# EAGLE board 18thF (EAGLE 9.6.2)
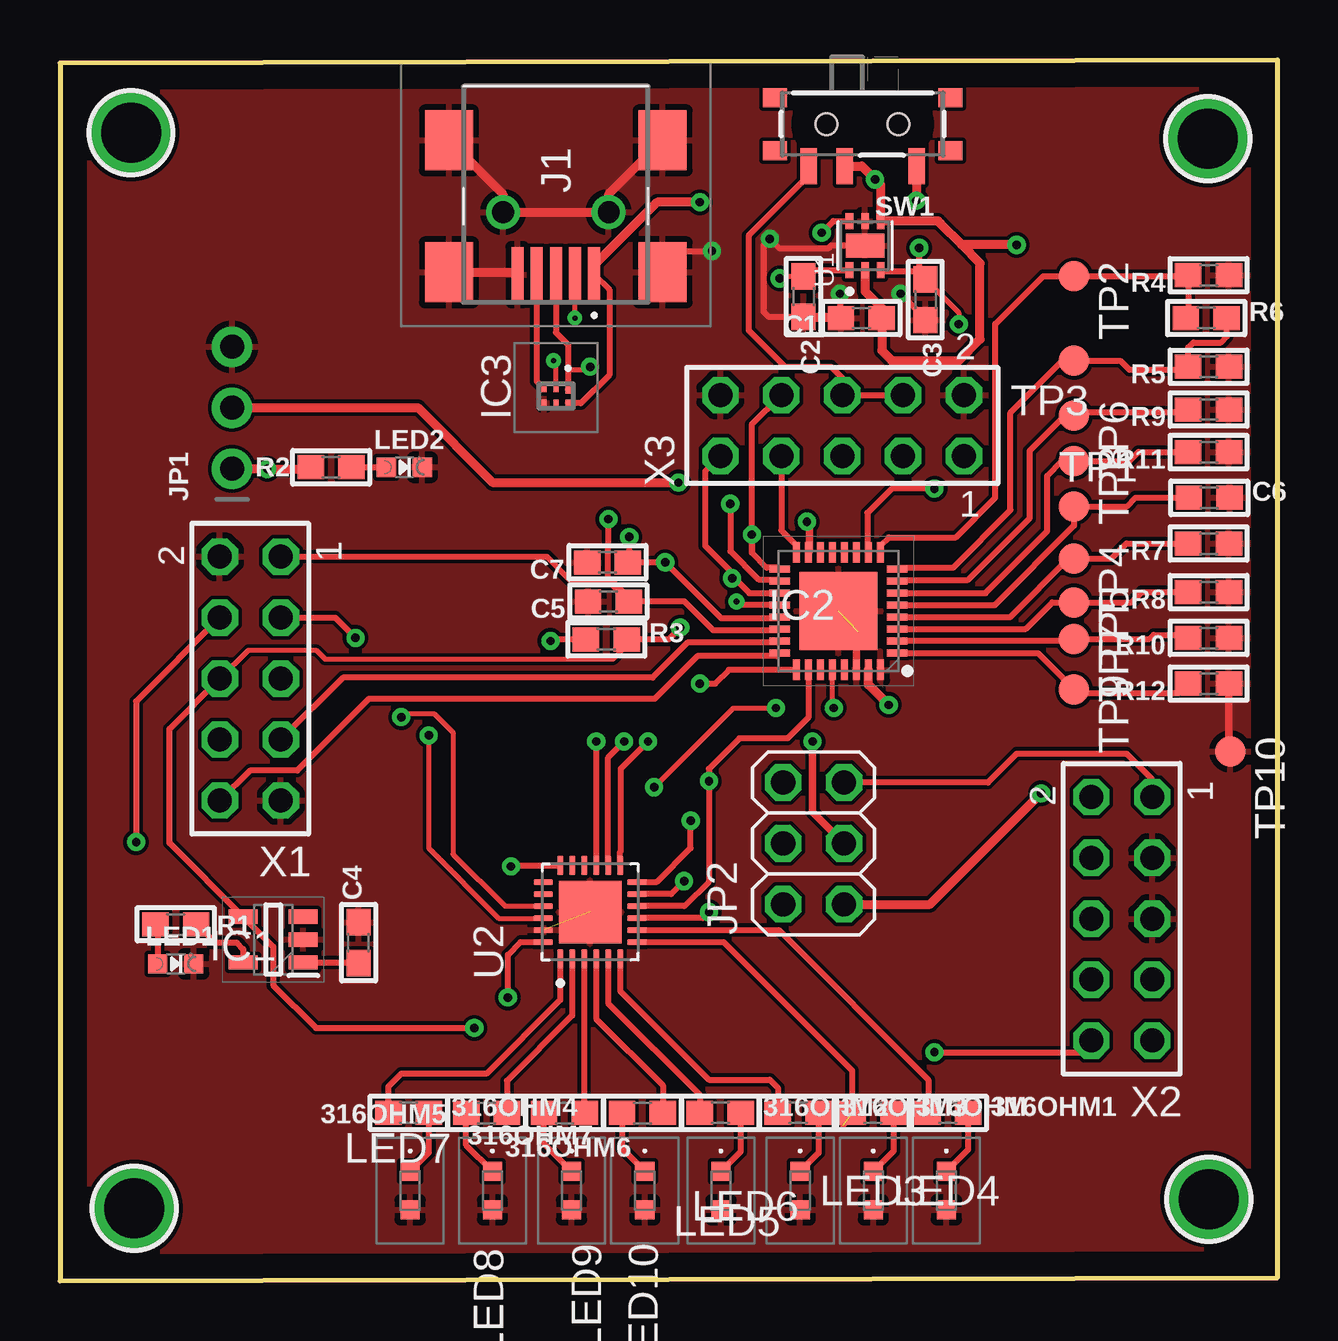
[diagram p0: board, top side]
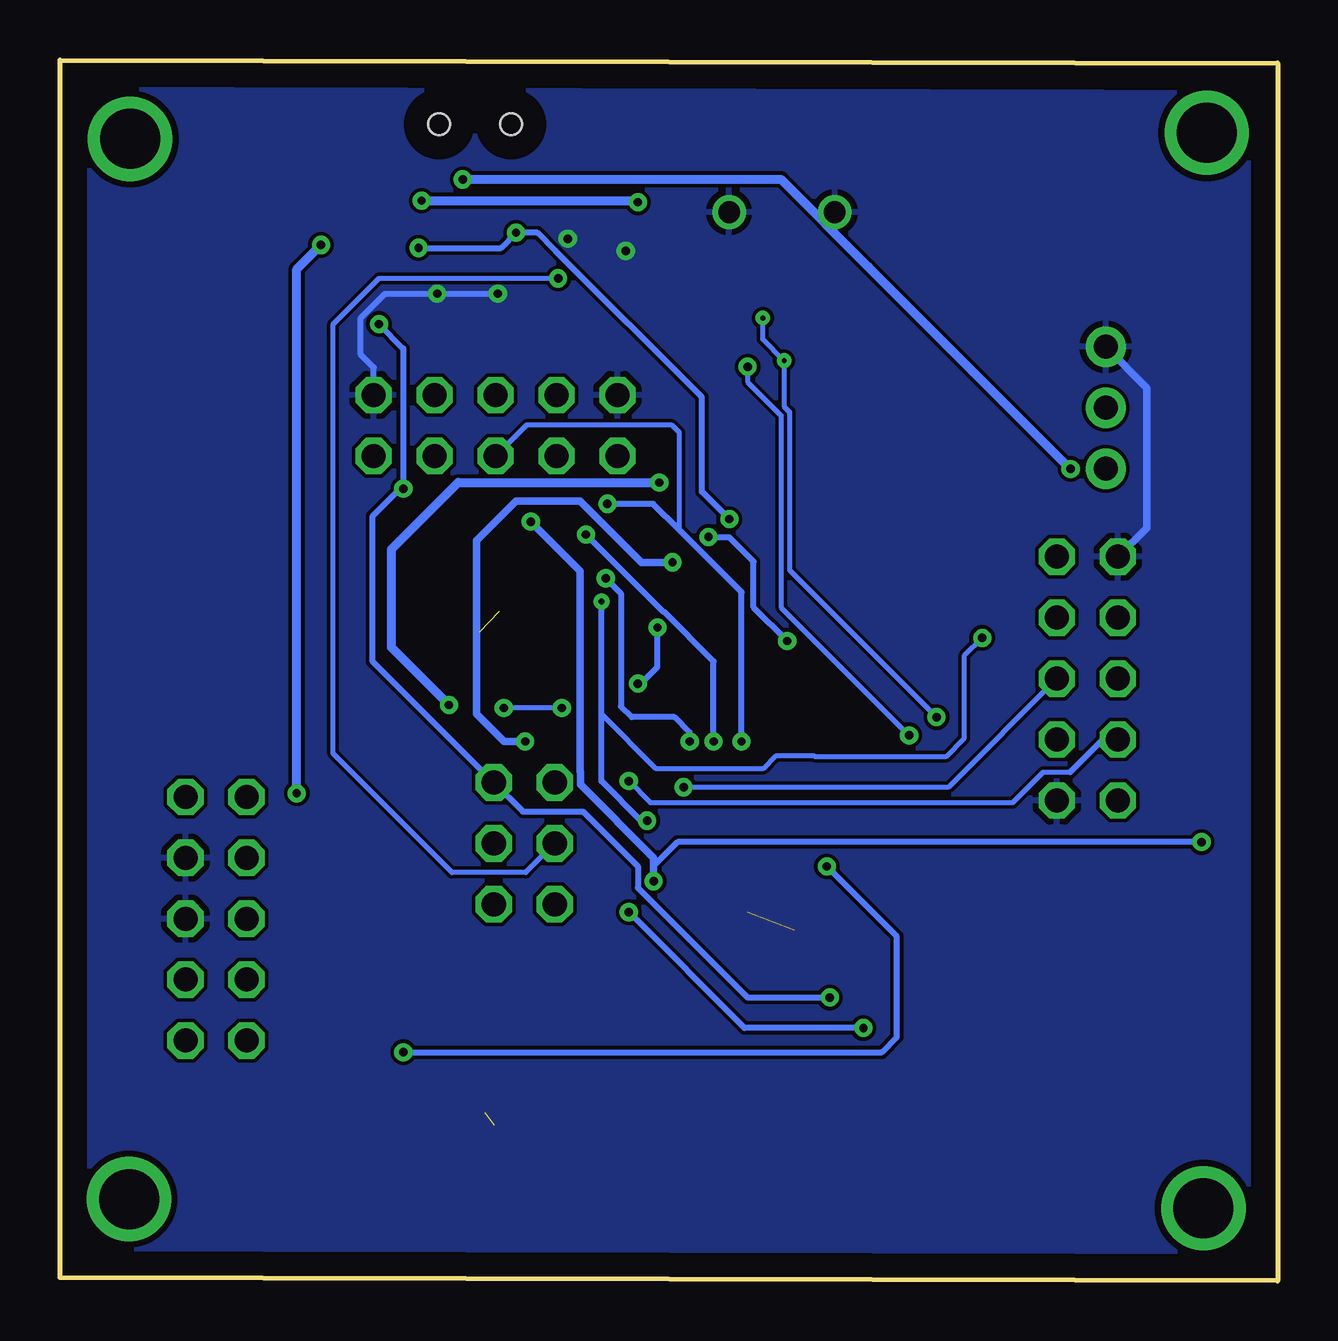
[diagram p1: board, bottom side, seen from below]

Size 50.76 x 50.89 mm. Coordinates in mm from the lower left corner, seen from the top.
Outline: 0,0 50.76,0.13 50.76,50.89 0,50.76 0,0
Copper layers (1*16): Top 0.035mm / dielectric 1.5mm / Bottom 0.035mm
Design rules "default": minimum track width 6mil, minimum drill 0.35mm, track to track 6mil, track to pad 6mil, pad to pad 6mil, via to via 6mil, smd to smd 6mil, copper to edge 40mil, drill to drill 6mil, minimum pad ring 10mil, minimum via ring 8mil, stop-mask expansion 4mil, vias tented up to drill 0mil, thermal gap 10mil

## Footprints (pad centres in the part's own frame; a part is rotated, then mirrored left to right if it is on the bottom)
0603 = smd 1.1 x 1: 1 -0.85,0; 2 0.85,0
SOT95P280X145-5N = smd 1.2 x 0.6: 1 -1.25,0.95; 2 -1.25,0; 3 -1.25,-0.95; 4 1.25,-0.95; 5 1.25,0.95
QFN50P500X500X100-33N = smd 0.85 x 0.3: 1 -2.45,1.75; 2 -2.45,1.25; 3 -2.45,0.75; 4 -2.45,0.25; 5 -2.45,-0.25; 6 -2.45,-0.75; 7 -2.45,-1.25; 8 -2.45,-1.75; 17 2.45,-1.75; 18 2.45,-1.25; 19 2.45,-0.75; 20 2.45,-0.25; 21 2.45,0.25; 22 2.45,0.75; 23 2.45,1.25; 24 2.45,1.75 | smd 0.3 x 0.85: 9 -1.75,-2.45; 10 -1.25,-2.45; 11 -0.75,-2.45; 12 -0.25,-2.45; 13 0.25,-2.45; 14 0.75,-2.45; 15 1.25,-2.45; 16 1.75,-2.45; 25 1.75,2.45; 26 1.25,2.45; 27 0.75,2.45; 28 0.25,2.45; 29 -0.25,2.45; 30 -0.75,2.45; 31 -1.25,2.45; 32 -1.75,2.45 | smd 3.25 x 3.25: 33 0,0
TPD4S012DRYR = smd 0.35 x 0.2: 1 -0.275,0.5 | smd 0.3 x 0.2: 2 -0.3,0; 3 -0.3,-0.5; 4 0.3,-0.5; 5 0.3,0; 6 0.3,0.5
17340352 = smd 2.3 x 0.5: 1 3.35,1.6; 2 3.35,0.8; 3 3.35,0; 4 3.35,-0.8; 5 3.35,-1.6 | drill 0.9 pad 1.4: MH1 0.75,2.2; MH2 0.75,-2.2 | smd 2.5 x 2: MP1 -2.25,4.45; MP2 3.25,4.45; MP3 3.25,-4.45; MP4 -2.25,-4.45
1X03_ROUND = drill 1 pad 1.676: 1 -2.54,0; 2 0,0; 3 2.54,0
2X03 = drill 1.016 octagon: 1 -2.54,-1.27; 2 -2.54,1.27; 3 0,-1.27; 4 0,1.27; 5 2.54,-1.27; 6 2.54,1.27
CHIPLED_0603_NOOUTLINE = smd 0.8 x 0.8: A 0,-0.75; C 0,0.75
PY1111CTR = smd 0.8 x 0.8: 1 0,0.8; 2 0,-0.8
SPDT_SMT_SSSS811101 = smd 0.7 x 1.5: A -2.25,1.75; B 0.75,1.75; C 2.25,1.75 | smd 1 x 0.8: SUP1 -3.65,1.1; SUP2 -3.65,-1.1; SUP3 3.65,1.1; SUP4 3.65,-1.1 | hole 0.9: -1.5,0; 1.5,0
B1,27 = smd 1.27 x 1.27: TP 0,0
SON65P200X200X80-7N = smd 0.66 x 0.32: 1 -1.025,0.65; 2 -1.025,0; 3 -1.025,-0.65; 4 1.025,-0.65; 5 1.025,0; 6 1.025,0.65 | smd 1 x 1.6: 7 0,0
QFN50P400X400X90-25N = smd 0.81 x 0.26: 1 -1.95,1.25; 2 -1.95,0.75; 3 -1.95,0.25; 4 -1.95,-0.25; 5 -1.95,-0.75; 6 -1.95,-1.25; 13 1.95,-1.25; 14 1.95,-0.75; 15 1.95,-0.25; 16 1.95,0.25; 17 1.95,0.75; 18 1.95,1.25 | smd 0.26 x 0.81: 7 -1.25,-1.95; 8 -0.75,-1.95; 9 -0.25,-1.95; 10 0.25,-1.95; 11 0.75,-1.95; 12 1.25,-1.95; 19 1.25,1.95; 20 0.75,1.95; 21 0.25,1.95; 22 -0.25,1.95; 23 -0.75,1.95; 24 -1.25,1.95 | smd 2.6 x 2.6: 25 0,0
MOUNTINGHOLE_2.5_PLATED = drill 2.5 pad 3.2: P$1 0,0
TSW-105-XX-G-D = drill 1 pad 1.5 octagon: 1 5.08,-1.27; 2 5.08,1.27; 3 2.54,-1.27; 4 2.54,1.27; 5 0,-1.27; 6 0,1.27; 7 -2.54,-1.27; 8 -2.54,1.27; 9 -5.08,-1.27; 10 -5.08,1.27

## Placement (x,y rotation side)
316OHM  0 ohm  [0603]  33.89,7 0 top
316OHM1  0 ohm  [0603]  37.01,7 0 top
316OHM2  0 ohm  [0603]  27.52,7 0 top
316OHM3  0 ohm  [0603]  30.77,7 0 top
316OHM4  0 ohm  [0603]  14.53,7 0 top
316OHM5  0 ohm  [0603]  17.78,7 180 top
316OHM6  0 ohm  [0603]  21.03,7 180 top
316OHM7  0 ohm  [0603]  24.28,7 180 top
C1  0.1uf  [0603]  33.4,40.13 180 top
C2  1uf  [0603]  30.99,41.02 270 top
C3  1uf  [0603]  36.07,40.89 270 top
C4  0.1uF  [0603]  12.45,14.1 90 top
C5  1uf  [0603]  22.86,28.32 180 top
C6  4.7nF  [0603]  47.9,32.64 0 top
C7  1uF  [0603]  22.82,29.95 180 top
IC1  TLV4051R5DBVR  [SOT95P280X145-5N]  8.89,14.22 180 top
IC2  MM101-02ADA-TR  [QFN50P500X500X100-33N]  32.45,27.92 180 top
IC3  TPD4S012DRYR  [TPD4S012DRYR]  20.68,36.89 270 top
J1  1734035-2  [17340352]  20.67,45.29 270 top
JP1  [1X03_ROUND]  7.17,36.39 90 top
JP2  [2X03]  31.41,18.23 90 top
LED1  [CHIPLED_0603_NOOUTLINE]  4.83,13.21 270 top
LED2  [CHIPLED_0603_NOOUTLINE]  14.35,33.91 270 top
LED3  PY1111C-TR  [PY1111CTR]  33.9,3.76 0 top
LED4  PY1111C-TR  [PY1111CTR]  36.95,3.76 0 top
LED5  PY1111C-TR  [PY1111CTR]  27.55,3.76 0 top
LED6  PY1111C-TR  [PY1111CTR]  30.85,3.76 0 top
LED7  PY1111C-TR  [PY1111CTR]  14.6,3.76 0 top
LED8  PY1111C-TR  [PY1111CTR]  18.02,3.76 0 top
LED9  PY1111C-TR  [PY1111CTR]  21.33,3.76 0 top
LED10  PY1111C-TR  [PY1111CTR]  24.38,3.76 0 top
R1  [0603]  4.83,14.86 180 top
R2  [0603]  11.3,33.91 0 top
R3  47k ohm  [0603]  22.77,26.74 0 top
R4  0 ohm  [0603]  47.88,41.91 180 top
R5  0 ohm  [0603]  47.88,38.1 180 top
R6  0 ohm  [0603]  47.78,40.13 0 top
R7  0 ohm  [0603]  47.88,30.73 180 top
R8  0 ohm  [0603]  47.88,28.7 180 top
R9  0 ohm  [0603]  47.88,36.32 180 top
R10  0 ohm  [0603]  47.88,26.8 180 top
R11  0 ohm  [0603]  47.88,34.54 180 top
R12  0 ohm  [0603]  47.88,24.89 180 top
SW1  [SPDT_SMT_SSSS811101]  33.46,48.21 180 top
TP1  TPB1,27  [B1,27]  42.27,32.28 0 top
TP2  TPB1,27  [B1,27]  42.27,41.87 270 top
TP3  TPB1,27  [B1,27]  42.27,38.35 180 top
TP4  TPB1,27  [B1,27]  42.27,30.1 270 top
TP5  TPB1,27  [B1,27]  42.27,28.28 270 top
TP6  TPB1,27  [B1,27]  42.27,36.07 270 top
TP7  TPB1,27  [B1,27]  42.27,26.76 270 top
TP8  TPB1,27  [B1,27]  42.27,34.16 270 top
TP9  TPB1,27  [B1,27]  42.27,24.64 270 top
TP10  TPB1,27  [B1,27]  48.78,22.06 270 top
U1  TPS71818-33DRVT  [SON65P200X200X80-7N]  33.56,43.15 90 top
U2  ATSAMD11D14A-MUT  [QFN50P400X400X90-25N]  22.1,15.37 90 top
U$4  MOUNTINGHOLE2.5  [MOUNTINGHOLE_2.5_PLATED]  2.96,47.85 90 top
U$5  MOUNTINGHOLE2.5  [MOUNTINGHOLE_2.5_PLATED]  47.84,47.6 90 top
U$6  MOUNTINGHOLE2.5  [MOUNTINGHOLE_2.5_PLATED]  47.88,3.4 90 top
U$7  MOUNTINGHOLE2.5  [MOUNTINGHOLE_2.5_PLATED]  3.1,3.02 90 top
X1  TSW-105-07-G-D  [TSW-105-XX-G-D]  7.93,25.1 90 top
X2  TSW-105-07-G-D  [TSW-105-XX-G-D]  44.26,15.09 90 top
X3  TSW-105-07-G-D  [TSW-105-XX-G-D]  32.6,35.65 0 top

## Library data of the parts
316OHM 316OHM1-316OHM7 C1-C7 JP1 LED1 LED2 R1-R12 SW1 U$4-U$7 = microbuilder
IC1 = TLV4051R5DBVR; DESCRIPTION: Analog Comparators; HEIGHT: 1.45mm; MANUFACTURER_NAME: Texas Instruments; MANUFACTURER_PART_NUMBER: TLV4051R5DBVR; MOUSER_PART_NUMBER: 595-TLV4051R5DBVR; MOUSER_PRICE-STOCK: https://www.mouser.co.uk/ProductDetail/Texas-Instruments/TLV4051R5DBVR?qs=yqaQSyyJnNja5IMcENT91w%3D%3D
IC2 = MM101-02ADA-TR; DESCRIPTION: Switching Voltage Regulators 8ch Charge Pump Driver IC - QFN; HEIGHT: 1mm; MANUFACTURER_NAME: Menlo Microsystems, Inc.; MANUFACTURER_PART_NUMBER: MM101-02ADA-TR; MOUSER_PART_NUMBER: 899-MM101-02ADA-TR; MOUSER_PRICE-STOCK: https://www.mouser.co.uk/ProductDetail/Menlo-Micro/MM101-02ADA-TR?qs=amGC7iS6iy%2F0TQ2O5UwmSQ%3D%3D
IC3 = TPD4S012DRYR; ARROW_PART_NUMBER: TPD4S012DRYR; ARROW_PRICE-STOCK: https://www.arrow.com/en/products/tpd4s012dryr/texas-instruments?region=nac; DESCRIPTION: ESD Suppressors / TVS Diodes 4Ch USB ESD Solution w/ Pwr Clamp; HEIGHT: 0.6mm; MANUFACTURER_NAME: Texas Instruments; MANUFACTURER_PART_NUMBER: TPD4S012DRYR; MOUSER_PART_NUMBER: 595-TPD4S012DRYR; MOUSER_PRICE-STOCK: https://www.mouser.co.uk/ProductDetail/Texas-Instruments/TPD4S012DRYR?qs=XGzIaZb%2FFYJve%2FbrCpoVgg%3D%3D
J1 = 1734035-2; ARROW_PART_NUMBER: 1734035-2; ARROW_PRICE-STOCK: https://www.arrow.com/en/products/1734035-2/te-connectivity?region=nac; DESCRIPTION: Body Features: Offset 0 MM | Connector Profile Mini | Shell Plating Material Nickel | Configuration Features: Number of Ports 1 | Number of Positions 5 | Contact Features: Contact Mating Area Plating Material Gold Flash over Palladium Nickel | Contact Current Rating (Max) 1 AMP | Contact Mating Area Plating Material Thickness .76 MICM | Contact Mating Area Plating Material Thickness 29.92 MICIN | Dimensions: PCB Thickness (Recommended) 1.57 MM | PCB Thickness (Recommended) .062 INCH | Housing Features: Cent; HEIGHT: 3.95mm; MANUFACTURER_NAME: TE Connectivity; MANUFACTURER_PART_NUMBER: 1734035-2; MOUSER_PART_NUMBER: 571-1734035-2; MOUSER_PRICE-STOCK: https://www.mouser.co.uk/ProductDetail/TE-Connectivity/1734035-2?qs=Lu3apKW7jUhaCoyjqYNFIA%3D%3D
JP2 = pinhead
LED3-LED10 = PY1111C-TR; ARROW_PART_NUMBER: PY1111C-TR; ARROW_PRICE-STOCK: https://www.arrow.com/en/products/py1111c-tr/stanley-electric?region=nac; DESCRIPTION: LED Uni-Color Yellow Green 570nm Automotive 2-Pin SMD T/R; HEIGHT: 0.8mm; MANUFACTURER_NAME: Stanley Electric; MANUFACTURER_PART_NUMBER: PY1111C-TR; MOUSER_PART_NUMBER: 327-PY1111CTR; MOUSER_PRICE-STOCK: https://www.mouser.co.uk/ProductDetail/Stanley-Electric/PY1111C-TR?qs=byeeYqUIh0PDxS2HVSqXtA%3D%3D
TP1-TP10 = testpad
U1 = TPS71818-33DRVT; AVAILABILITY: In Stock; CHECK_PRICES: https://www.snapeda.com/parts/TPS71818-33DRVT/Texas+Instruments/view-part/?ref=eda; DESCRIPTION: 200-mA, high-PSRR, dual-channel low-dropout voltage regulator with enable; MF: Texas Instruments; MP: TPS71818-33DRVT; PACKAGE: WSON-6 Texas Instruments; PRICE: None; SNAPEDA_LINK: https://www.snapeda.com/parts/TPS71818-33DRVT/Texas+Instruments/view-part/?ref=snap
U2 = ATSAMD11D14A-MUT; AVAILABILITY: In Stock; CHECK_PRICES: https://www.snapeda.com/parts/ATSAMD11D14A-MUT/Microchip/view-part/?ref=eda; DESCRIPTION: ARM® Cortex®-M0+ SAM D11D Microcontroller IC 32-Bit Single-Core 48MHz 16KB (16K x 8) FLASH 24-QFN (4x4); MF: Microchip Technology; MP: ATSAMD11D14A-MUT; PACKAGE: QFN-24 Microchip; PRICE: None; SNAPEDA_LINK: https://www.snapeda.com/parts/ATSAMD11D14A-MUT/Microchip/view-part/?ref=snap
X1-X3 = con-samtec; MF: Samtec Inc.; MPN: TSW-105-07-G-D

## Nets
1.8V: C2.1 JP2.4 U1.1
5.0V: C4.1 IC1.1
+3V3: C3.1 C5.1 IC2.10 IC2.22 JP2.5 U1.3 U1.6 U2.24 X1.1 X2.1
+5V: C1.1 JP1.1 JP2.1 R2.1 SW1.B U1.2 U1.4
+5V_HEADER: SW1.C X3.4 X3.6
+5V_USB: IC3.6 J1.1 SW1.A
CP_EN: IC2.15 U2.11 X1.4
FLIP_BIT: IC2.24 X1.10
FLT: IC1.5 R1.1
FLT_MODE: IC2.26 U2.10 X1.8
FLTB: IC1.4 IC2.25 R3.2 U2.9 X1.6
GND: C1.2 C2.2 C3.2 C4.2 C5.2 C6.2 C7.2 IC1.2 IC2.30 IC2.32 IC2.33 IC3.4 J1.5 J1.MH1 J1.MH2 J1.MP1 J1.MP2 J1.MP3 J1.MP4 JP1.3 LED1.C LED2.C LED3.2 LED4.2 LED5.2 LED6.2 LED7.2 LED8.2 LED9.2 LED10.2 R4.1 R5.1 R7.1 R8.1 R9.1 R10.1 R11.1 R12.1 TP10.TP U1.5 U1.7 U2.23 U2.25 X1.2 X1.9 X2.3 X2.5 X3.2 X3.10
HV0: IC2.9 R4.2 R6.1 TP2.TP
HV0_LED: 316OHM1.1 U2.8
HV1: IC2.8 R5.2 R6.2 TP3.TP
HV1_LED: 316OHM.1 U2.7
HV2: IC2.7 R9.2 TP6.TP
HV2_LED: 316OHM3.1 U2.6
HV3: IC2.6 R11.2 TP8.TP
HV3_LED: 316OHM2.1 U2.5
HV4: IC2.4 R7.2 TP4.TP
HV4_LED: 316OHM7.1 U2.4
HV5: IC2.3 R8.2 TP5.TP
HV5_LED: 316OHM6.1 U2.3
HV6: IC2.2 R10.2 TP7.TP
HV6_LED: 316OHM5.1 U2.2
HV7: IC2.1 R12.2 TP9.TP
HV7_LED: 316OHM4.1 U2.1
MISO/CTL3: IC2.18 U2.15 X3.5
MODE: IC2.20 U2.12 X1.3
MOSI/CTL2: IC2.17 U2.14 X3.8
N$2: LED1.A R1.2
N$14: LED2.A R2.2
N$18: U2.16
N$21: U2.17
N$23: U2.19
N$24: U2.20
N$30: 316OHM.2 LED3.1
N$32: 316OHM1.2 LED4.1
N$33: 316OHM2.2 LED5.1
N$34: 316OHM3.2 LED6.1
N$35: 316OHM4.2 LED7.1
N$36: 316OHM5.2 LED8.1
N$37: 316OHM6.2 LED9.1
N$38: 316OHM7.2 LED10.1
OCS: IC2.23 X1.7
SAM_RST: U2.18 X2.10
SCK/CTL1: IC2.16 X3.7
SSB/CTL4: IC2.19 U2.13 X3.9
SWDCLK: X2.4
SWDIO: X2.2
USB_ID: IC3.3 J1.4
USB_N: IC3.2 J1.2 U2.21
USB_P: IC3.1 J1.3 U2.22
VDD_IO: C7.1 IC2.21 JP2.3 R3.1
VIN: IC2.31 JP1.2
VOS: IC2.28 X1.5
VPP: C6.1 IC2.5 TP1.TP

## Tracks (layer width: path | path; a pad name or v marks a point on that pad's centre or on a via)
1.8V  (via drill 0.35 pad 0.2)
  Top 0.203: v30,41.78 30.08,41.87 C2.1
  Top 0.254: C2.1 31.24,42.12 U1.1
  Bottom 0.203: JP2.4 31.35,17.02 34.42,17.02 39.37,21.97 39.37,39.88 37.47,41.78 v30,41.78
5.0V
  Top 0.254: IC1.1 12.42,13.27 C4.1
+3V3  (via drill 0.35 pad 0.2)
  Top 0.203: C3.1 37.47,40.35 v37.47,39.88
  Top 0.254: X2.1 45.53,20.89 44.45,21.97 39.88,21.97 38.68,20.77 JP2.5 | X1.1 20.3,30.18 21.31,29.17 22.86,29.17 C5.1 | C5.1 26.03,28.32 27.24,27.11 29.94,27.11 IC2.22 | v18.67,11.81 18.67,13.59 19.2,14.12 U2.24 | C3.1 35.81,42 | 35.81,42 35.73,42.08 34.25,42.08 U1.3 | 35.81,42 v35.81,43.05 | v31.75,43.69 32.24,44.17 U1.6 | v36.45,33.02 34.67,33.02 33.66,32 33.66,30.41 IC2.10 | C5.1 23.71,28.47 22.84,29.33 22.84,30.56 22.86,30.58 v22.86,31.75
  Bottom 0.254: 18.8,11.81 v18.67,11.81 22.1,11.81 26.67,16.38 26.67,17.27 28.96,19.56 31.47,19.56 JP2.5 37.72,25.81 37.72,31.88 36.58,33.02 v36.45,33.02 36.45,38.86 v37.47,39.88 | v35.81,43.05 32.38,43.05 v31.75,43.69 30.86,43.69 30.1,42.93 24,36.83 24,32.89 v22.86,31.75
+5V  (via drill 0.35, 0.35 pad 0.2)
  Top 0.381: U1.2 33.56,41.24 34.25,40.55 C1.1 34.25,38.77 34.67,38.35 37.47,38.35 38.35,39.24 38.35,42.42 37.59,43.18 | SW1.B 33.42,46.46 v33.97,45.91 34.21,45.67 U1.4 36.6,44.17 36.7,44.07 37.59,43.18 | JP1.1 8.62,33.85 v8.64,33.84 10.38,33.84 R2.1 | JP2.1 36.27,15.69 v40.89,20.32 | v39.88,43.18 37.59,43.18
  Bottom 0.381: v8.64,33.84 17.05,42.26 20.71,45.91 v33.97,45.91 | v40.89,20.32 40.89,42.16 v39.88,43.18
+5V_HEADER
  Top 0.254: SW1.C 31.21,46.07 28.7,43.56 28.7,39.62 30.23,38.1 32.13,38.1 32.6,37.63 X3.6 X3.4
+5V_USB  (via drill 0.35 pad 0.2)
  Top 0.254: J1.1 22.9,41.31 22.9,37.76 21.72,36.58 21.19,36.58 IC3.6
  Top 0.381: J1.1 22.27,42.33 24.89,44.96 v26.67,44.96 | SW1.A 35.71,45.04 v35.69,45.02
  Bottom 0.381: v35.69,45.02 26.73,45.02 v26.67,44.96
CP_EN  (via drill 0.35, 0.35 pad 0.55)
  Top 0.254: X1.4 3.17,24.15 v3.17,18.29 | v26.02,16.66 25.47,16.12 U2.11
  Top 0.305: v31.14,31.64 31.24,31.54 31.24,30.41 IC2.15
  Bottom 0.254: v3.17,18.29 25.02,18.29 26.04,17.27 26.04,16.68 v26.02,16.66
  Bottom 0.305: v26.02,16.66 26.02,17.63 29.07,20.69 29.07,21.21 29.08,21.22 29.08,29.59 v31.14,31.64
FLIP_BIT
  Top 0.254: IC2.24 29.87,26.04 26.57,26.04 24.78,24.26 12.87,24.26 9.89,21.27 7.92,21.27 X1.10
FLT
  Top 0.254: R1.1 6.44,14.1 7.37,14.1 7.64,13.82 IC1.5
FLT_MODE  (via drill 0.35 pad 0.55)
  Top 0.254: IC2.26 31.2,23.47 30.33,22.61 28.32,22.61 27.05,21.34 v27.05,20.83 27.05,16.64 26.03,15.62 U2.10
  Bottom 0.203: v27.05,20.83 26.16,19.94 11.05,19.94 9.78,21.21 8.65,21.21
  Bottom 0.254: 8.65,21.21 7.3,22.56 X1.8
FLTB  (via drill 0.35)
  Top 0.203: X1.6 7.86,26.29 10.67,26.29 11.05,25.91 23.04,25.91 23.88,26.74
  Top 0.254: IC2.25 27.88,25.47 27.3,24.89 v26.67,24.89 | v25.86,27.23 25.37,26.74 23.88,26.74 R3.2 | X1.6 4.57,23.01 4.57,18.24 IC1.4 8.89,13.92 8.89,12.32 10.67,10.54 v17.27,10.54 | v27.05,15.37 26.8,15.12 U2.9
  Bottom 0.254: v26.67,24.89 26.54,24.89 25.86,25.58 v25.86,27.23 | v17.27,10.54 22.23,10.54 v27.05,15.37
GND  (via drill 0.35)  (2 unrouted)
  Top 0.254: 48.86,38.23 R5.1 | v35.04,41.15 36.07,40.12 C3.2 | v32.51,41.15 32.51,40.17 | U1.7 32.14,43.15 32.02,43.03 30,43.03 v29.59,43.43 29.34,43.18 29.34,40.39 29.55,40.17 C2.2 | J1.MP2 26,42.93 v27.18,42.93
  Top 0.305: R12.1 48.73,22.11 TP10.TP | IC2.30 33.2,26.97 33.27,27.05
  Top 0.381: C2.2 32.51,40.17 C1.2 | J1.MP1 22.87,45.29 J1.MH1 J1.MH2 18.47,45.29 J1.MP4 | J1.MP3 18.97,42.04 J1.5
  Bottom 0.254: X3.2 37.69,38.07 38.23,38.61 38.23,40.13 37.21,41.15 v35.04,41.15 v32.51,41.15
  Bottom 0.305: JP1.3 5.46,37.22 5.46,31.38 X1.2
  pour Top: 0.13,50.55 50.55,50.55 50.55,1.52 49.28,0.25 2.16,0.25 0.13,2.29
  pour Bottom: 1.02,50.16 49.28,50.16 49.78,49.66 49.78,2.79 47.88,0.89 2.29,0.89 1.02,2.16
HV0
  Top 0.254: TP2.TP 42.36,41.78 | TP2.TP 46.99,41.87 R4.2 47.03,40.23 R6.1 | IC2.9 34.2,30.64 34.54,30.99 37.34,30.99 38.99,32.64 38.99,39.88 40.98,41.87 TP2.TP
HV0_LED
  Top 0.254: U2.8 29.96,14.62 36.2,8.38 36.2,7.03 316OHM1.1
HV1
  Top 0.254: R6.2 48.64,40.12 48.64,39.37 48.39,39.12 47.24,39.12 47.03,38.9 R5.2 46.9,37.97 44.58,37.97 44.2,38.35 TP3.TP 41.78,38.35 39.62,36.2 39.62,32.13 37.21,29.72 34.95,29.72 IC2.8
HV1_LED  (1 unrouted)
  Top 0.254: U2.7 27.67,14.12 33.02,8.76 33.02,6.86 32.64,6.48
HV2
  Top 0.254: R9.2 46.9,36.2 42.39,36.2 TP6.TP 41.88,36.07 40.41,34.59 40.41,31.77 37.85,29.21 34.94,29.21 IC2.7
HV2_LED
  Top 0.254: U2.6 23.35,12.09 27.05,8.38 29.59,8.38 29.92,8.05 316OHM3.1
HV3
  Top 0.254: R11.2 44.96,34.54 44.58,34.16 TP8.TP 41.76,34.16 41.15,33.55 41.15,31.24 38.57,28.67 IC2.6
HV3_LED
  Top 0.254: U2.5 22.85,11.57 26.67,7.74 316OHM2.1
HV4
  Top 0.254: 42.28,30.08 TP4.TP | TP4.TP 43.81,30.1 44.45,30.73 R7.2 | IC2.4 39.61,27.67 42.04,30.1 TP4.TP
HV4_LED
  Top 0.254: U2.4 22.35,10.93 25.13,8.15 316OHM7.1
HV5
  Top 0.254: R8.2 45.09,28.7 44.66,28.28 TP5.TP 41.36,28.28 40.26,27.18 IC2.3
HV5_LED
  Top 0.152: 21.85,7.03 316OHM6.1
  Top 0.254: U2.3 21.85,7.03
HV6
  Top 0.254: R10.2 46.9,26.92 45.59,26.92 45.43,26.76 TP7.TP 42.18,26.67 IC2.2
HV6_LED
  Top 0.254: U2.2 21.35,11.06 18.63,8.34 316OHM5.1
HV7
  Top 0.254: TP9.TP 42.42,24.64 42.29,24.51 42.42,24.51 | 42.42,24.51 46.65,24.51 R12.2 | IC2.1 40.76,26.17 42.42,24.51
HV7_LED
  Top 0.254: U2.1 20.85,11.7 17.78,8.64 14.22,8.64 13.68,8.1 316OHM4.1
MISO/CTL3  (via drill 0.35)
  Top 0.254: v22.35,22.48 v22.35,22.47 U2.15 | IC2.18 29.92,29.24 29.11,29.24 27.94,30.41 v27.94,32.39
  Bottom 0.203: X3.5 31.3,35.69 25.27,35.69 24.96,35.37 24.96,31.3
  Bottom 0.254: v22.35,22.48 22.35,28.7 24.96,31.3 26.04,32.39 v27.94,32.39
MODE  (via drill 0.25 pad 0.25, 0.35 pad 0.55)
  Top 0.254: X1.3 11.48,27.64 v12.32,26.8 | U2.12 24.07,16.64 24.89,16.64 26.29,18.03 v26.29,19.18 | IC2.20 28.35,28.17 v28.19,28.32
  Bottom 0.203: v12.32,26.8 13.08,26.04 13.08,22.61 13.84,21.84 19.28,21.84 19.3,21.87 20.93,21.87 21.46,21.34 25.91,21.34 28.19,23.62
  Bottom 0.254: v26.29,19.18 26.54,19.18 28.19,20.83 28.19,23.62 v28.19,28.32
MOSI/CTL2  (via drill 0.35, 0.35 pad 0.55)
  Top 0.254: X3.8 28.83,35.69 28.83,30.35 28.84,30.34 | IC2.17 29.94,29.72 29.46,29.72 28.84,30.34 | U2.14 22.85,21.81 v23.51,22.48 | v28.84,31.11 28.84,30.34
  Bottom 0.254: v28.84,31.11 25.62,27.89 25.58,27.89 23.51,25.82 v23.51,22.48
N$2
  Top 0.254: R1.2 4.08,14.76 LED1.A
N$14
  Top 0.254: R2.2 LED2.A
N$30
  Top 0.254: 316OHM.2 34.74,5.4 LED3.1
N$32
  Top 0.254: LED4.1 37.86,5.48 316OHM1.2
N$33
  Top 0.254: 316OHM2.2 28.37,5.39 LED5.1
N$34
  Top 0.254: 316OHM3.2 31.62,5.33 LED6.1
N$35
  Top 0.254: LED7.1 15.38,5.35 316OHM4.2
N$36
  Top 0.254: LED8.1 16.93,5.66 316OHM5.2
N$37
  Top 0.254: LED9.1 20.18,5.71 316OHM6.2
N$38
  Top 0.254: 316OHM7.2 23.43,5.51 LED10.1
OCS
  Top 0.254: IC2.23 29.92,26.6 26.15,26.6 24.7,25.15 11.79,25.15 X1.7
SAM_RST  (via drill 0.35 pad 0.2)
  Top 0.254: v36.45,9.53 36.47,9.51 42.48,9.51 X2.10 | v18.8,17.27 18.84,17.32 U2.18
  Bottom 0.254: v36.45,9.53 16.51,9.53 15.88,10.16 15.88,14.35 v18.8,17.27
SCK/CTL1
  Top 0.254: X3.7 30.07,31.28 30.7,30.65 IC2.16
SSB/CTL4  (via drill 0.35, 0.35 pad 0.55)
  Top 0.254: X3.9 26.89,33.75 26.89,30.64 28.13,29.4 v28.01,29.28 28.12,29.28 28.74,28.67 IC2.19 | v24.51,22.48 23.37,21.34 23.37,17.91 23.35,17.89 U2.13
  Bottom 0.254: v24.51,22.48 24.51,22.86 25.15,23.49 26.92,23.49 27.38,23.95 27.38,28.65 v28.01,29.28
USB_ID
  Top 0.254: J1.4 19.87,37.72 19.87,37.5 IC3.3
USB_N  (via drill 0.2 pad 0.2, 0.35 pad 0.2)
  Top 0.203: IC3.2 20.68,38.25 v20.57,38.35 | v21.46,40.13 J1.2 | v14.22,23.49 14.35,23.62 15.62,23.62 16.38,22.86 16.38,17.78 18.55,15.62 U2.21
  Bottom 0.203: v21.46,40.13 21.46,39.24 v20.57,38.35 20.57,36.44 20.34,36.22 20.34,29.62 v14.22,23.49
USB_P  (via drill 0.35 pad 0.2)
  Top 0.203: 21.18,37.97 21.97,37.97 v22.1,38.1 | v15.37,22.73 15.37,18.03 18.29,15.11 U2.22
  Top 0.254: J1.3 20.67,39.53 21.18,39.02 21.18,37.97 IC3.1
  Bottom 0.203: v22.1,38.1 22.1,37.47 20.7,36.07 20.7,28.07 v15.37,22.73
VDD_IO  (via drill 0.35, 0.35 pad 0.2)
  Top 0.254: IC2.21 29.94,27.61 27.57,27.61 v25.23,29.95 C7.1 23.73,30 v23.73,31.01 | R3.1 20.52,26.74 v20.45,26.67
  Top 0.305: JP2.3 31.37,19.54 v31.37,22.48
  Bottom 0.254: v20.45,26.67 21.84,28.07 21.84,29.97 22.86,30.99 23.75,30.99 v23.73,31.01
  Bottom 0.305: v31.37,22.48 32.26,22.48 33.4,23.62 33.4,30.86 31.75,32.51 29.08,32.51 26.52,29.95 v25.23,29.95
VIN  (via drill 0.35 pad 0.2)
  Top 0.381: JP1.2 14.92,36.39 18.03,33.27 v25.78,33.27 | v34.54,24 33.7,24.85 IC2.31
  Bottom 0.381: v25.78,33.27 34.16,33.27 36.96,30.48 36.96,26.42 v34.54,24
VOS  (via drill 0.35 pad 0.2)
  Top 0.203: v24.77,20.57 28.07,23.88 v29.84,23.88 | v32.26,23.88 32.2,23.94 IC2.28
  Bottom 0.203: X1.5 13.73,20.57 v24.77,20.57 | v29.84,23.88 v32.26,23.88
VPP
  Top 0.254: C6.1 44.83,32.64 44.47,32.28 TP1.TP 42.27,31.47 38.96,28.17 IC2.5